# EAGLE board motor (EAGLE 4.16)
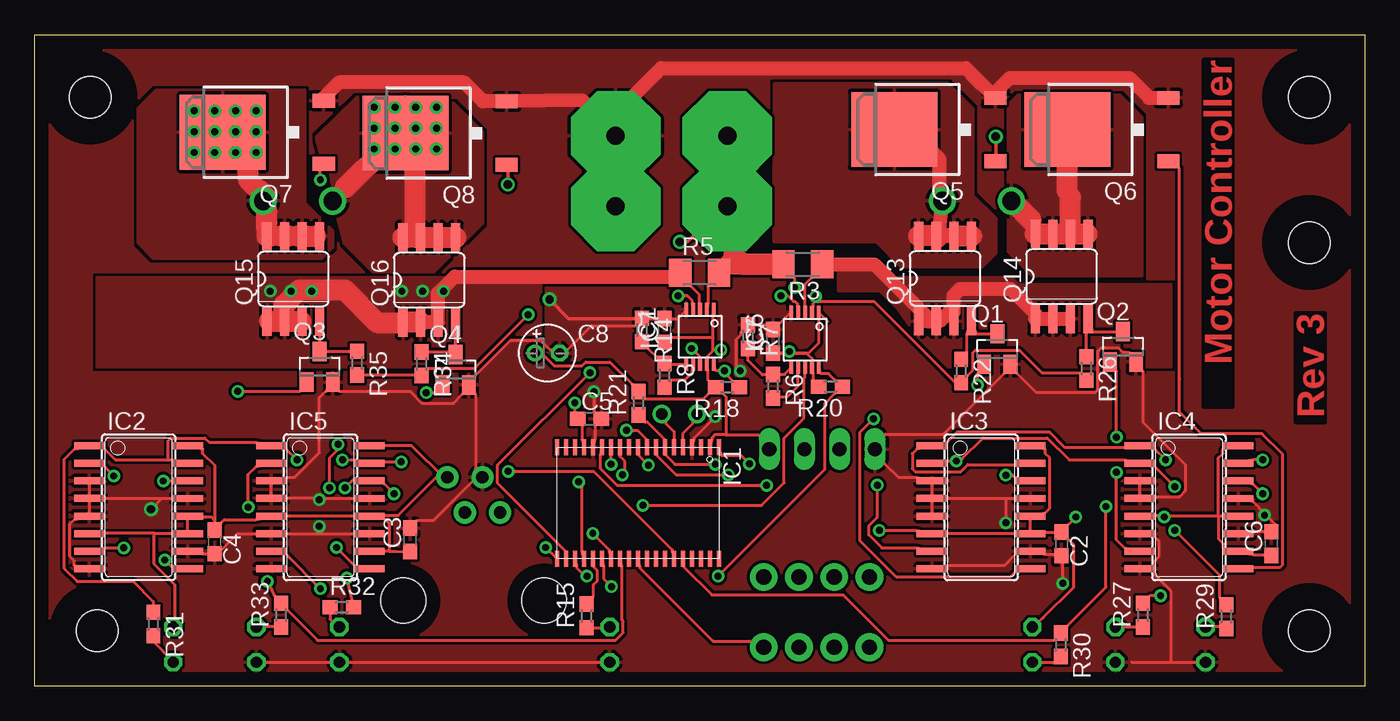
[diagram p0: board, top side]
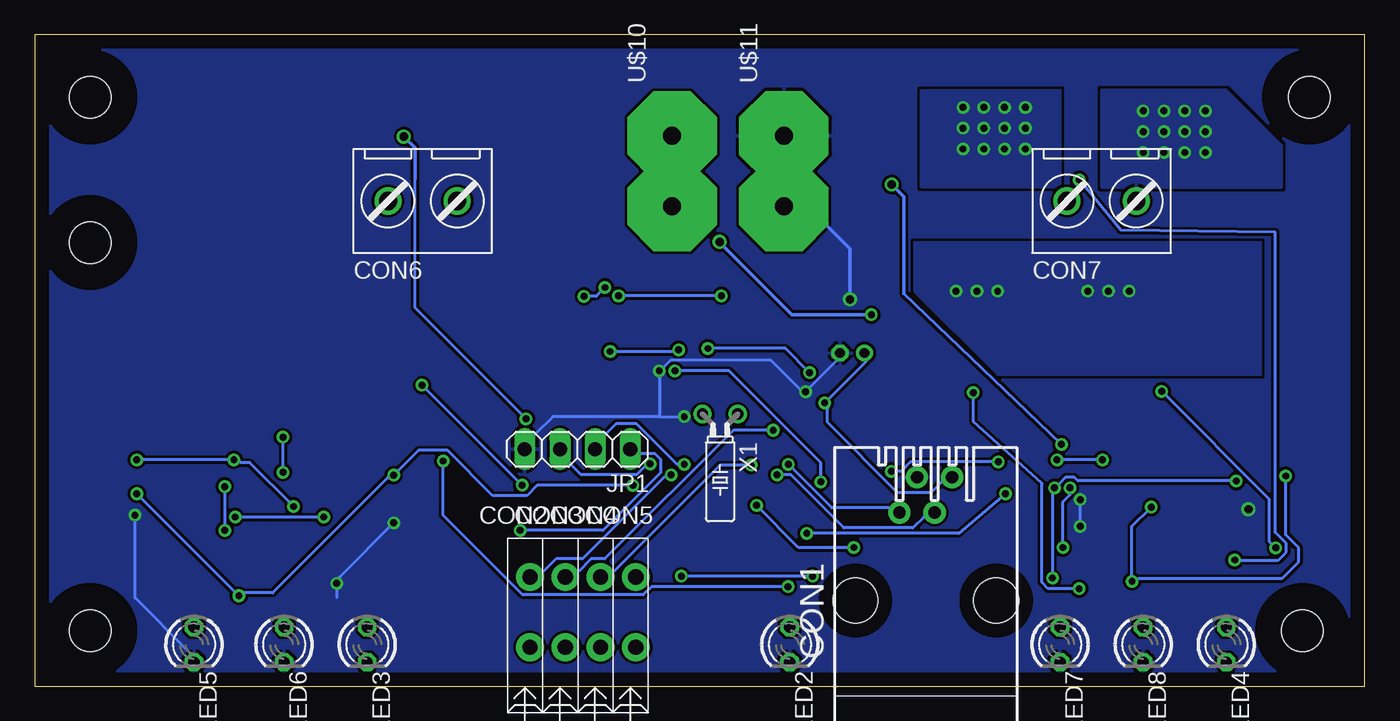
[diagram p1: board, bottom side, seen from below]

Size 96 x 47 mm. Coordinates in mm from the lower left corner, seen from the top.
Outline: 96,0 0,0 0,47 96,47 96,0
Copper layers (1*16): Top 0.035mm / dielectric 1.5mm / Bottom 0.035mm
Design rules "default": minimum track width 0.2mm, minimum drill 0.5mm, track to track 0.2mm, track to pad 0.2mm, pad to pad 0.2mm, via to via 0.2mm, smd to smd 0mil, copper to edge 40mil, drill to drill 8mil, minimum pad ring 10mil, minimum via ring 8mil, stop-mask expansion 4mil, vias tented up to drill 0mil, thermal gap 10mil
Holes 3 mm at 92,42.5 92,4 4,42.5 4.5,4 92,32
tRestrict: area 0.8,39.3 to 7.2,45.7; area 1.3,0.8 to 7.7,7.2; area 88.8,39.3 to 95.2,45.7; area 88.8,28.8 to 95.2,35.2; area 88.8,0.8 to 95.2,7.2
bRestrict: area 0.8,39.3 to 7.2,45.7; area 1.3,0.8 to 7.7,7.2; area 88.8,39.3 to 95.2,45.7; area 88.8,28.8 to 95.2,35.2; area 88.8,0.8 to 95.2,7.2

## Footprints (pad centres in the part's own frame; a part is rotated, then mirrored left to right if it is on the bottom)
C0603 = smd 1.1 x 1: 1 -0.85,0; 2 0.85,0
E1,8-4 = drill 0.711 pad 1.168 round: + -0.889,0 | drill 0.711 pad 1.168 octagon: - 0.889,0
RJ11 = drill 0.889 pad 1.6 round: 1 1.905,7.62; 2 0.635,5.08; 3 -0.635,7.62; 4 -1.905,5.08 | hole 3.251: -5.08,-1.27; 5.08,-1.27
CAGECLAMP = drill 1.1 pad 2 round: 1 0,-0.01; 2 0,-5.08
LUMBERG_CAGE_2 = drill 1.3 round: 1 -2.5,0; 2 2.5,0
TSSOP38 = smd 1.15 x 0.3: 1 0,0; 2 0,-0.65; 3 0,-1.3; 4 0,-1.95; 5 0,-2.6; 6 0,-3.25; 7 0,-3.9; 8 0,-4.55; 9 0,-5.2; 10 0,-5.85; 11 0,-6.5; 12 0,-7.15; 13 0,-7.8; 14 0,-8.45; 15 0,-9.1; 16 0,-9.75; 17 0,-10.4; 18 0,-11.05; 19 0,-11.7; 20 8.05,-11.7; 21 8.05,-11.05; 22 8.05,-10.4; 23 8.05,-9.75; 24 8.05,-9.1; 25 8.05,-8.45; 26 8.05,-7.8; 27 8.05,-7.15; 28 8.05,-6.5; 29 8.05,-5.85; 30 8.05,-5.2; 31 8.05,-4.55; 32 8.05,-3.9; 33 8.05,-3.25; 34 8.05,-2.6; 35 8.05,-1.95; 36 8.05,-1.3; 37 8.05,-0.65; 38 8.05,0
SOP16 = smd 0.5 x 2.2: 1 -4.445,-3.55; 2 -3.185,-3.55; 3 -1.915,-3.55; 4 -0.645,-3.55; 5 0.635,-3.55; 6 1.895,-3.55; 7 3.165,-3.55; 8 4.435,-3.55; 9 4.445,3.55; 10 3.175,3.55; 11 1.905,3.55; 12 0.635,3.55; 13 -0.635,3.55; 14 -1.905,3.55; 15 -3.175,3.55; 16 -4.445,3.55
UMAX = smd 0.94 x 0.254: 1 -1.358,0.193; 2 -1.358,-0.307; 3 -1.358,-0.808; 4 -1.358,-1.308; 5 -1.358,-1.808; 6 2.616,-1.808; 7 2.616,-1.308; 8 2.616,-0.808; 9 2.616,-0.307; 10 2.616,0.193
1X04 = drill 1.016 long: 1 -3.81,0; 2 -1.27,0; 3 1.27,0; 4 3.81,0
LED3MM = drill 0.813 octagon: A -1.27,0; K 1.27,0
SOT23 = smd 1 x 1.4: 1 -0.95,-1.1; 2 0.95,-1.1; 3 0,1.1
TO252-3 = smd 1 x 1.6: 1 -2.16,-5.72; 3 2.4,-5.72 | smd 5.4 x 6.2: 2 0.12,1.58
SO08 = smd 0.66 x 2.032: 1 -1.905,-3.073; 2 -0.635,-3.073; 3 0.635,-3.073; 4 1.905,-3.073; 5 1.905,3.073; 6 0.635,3.073; 7 -0.635,3.073; 8 -1.905,3.073
M1206 = smd 1.6 x 2: 1 -1.4,0; 2 1.4,0
R0603 = smd 1.1 x 1: 1 -0.85,0; 2 0.85,0
SPADE = drill 1.3 pad 6.452 octagon: P$1 -5.08,-3.175; P$2 0,-3.175
TC26H = drill 0.813 round: 1 -1.27,0; 2 1.27,0

## Placement (x,y rotation side)
C1  100nf  [C0603]  45.45,25.66 90 top
C2  100nf  [C0603]  74.11,10.27 270 top
C3  100nf  [C0603]  27.09,10.55 90 top
C4  100nf  [C0603]  12.98,10.41 270 top
C5  100nf  [C0603]  40.05,19.28 0 top
C6  100nf  [C0603]  89.25,10.28 90 top
C7  100nf  [C0603]  53.29,24.88 90 top
C8  100uF  [E1,8-4]  37,24.03 0 top
CON1  MODULE_CON  [RJ11]  31.69,7.45 0 bottom
CON2  FB0  [CAGECLAMP]  60.24,2.8 180 bottom
CON3  FB1  [CAGECLAMP]  57.7,2.8 180 bottom
CON4  FB3  [CAGECLAMP]  55.16,2.8 180 bottom
CON5  FB2  [CAGECLAMP]  52.62,2.8 180 bottom
CON6  HEADER_2  [LUMBERG_CAGE_2]  68,35 0 bottom
CON7  HEADER_2  [LUMBERG_CAGE_2]  19,35 0 bottom
IC1  MSP430F2234  [TSSOP38]  49.4,17.23 270 top
IC2  74153NS  [SOP16]  7.5,12.9 270 top
IC3  74153NS  [SOP16]  68.3,12.9 270 top
IC4  74153NS  [SOP16]  83.3,12.9 270 top
IC5  74153NS  [SOP16]  20.62,12.9 270 top
IC6  MAX4069  [UMAX]  56.41,25.62 270 top
IC7  MAX4069  [UMAX]  48.83,25.84 270 top
JP1  SBW  [1X04]  56.83,17.09 180 bottom
LED2  [LED3MM]  41.5,3 270 bottom
LED3  PWM0  [LED3MM]  72,3 270 bottom
LED4  PWM1  [LED3MM]  10,3 270 bottom
LED5  B0  [LED3MM]  84.5,3 270 bottom
LED6  A0  [LED3MM]  78,3 270 bottom
LED7  A1  [LED3MM]  22,3 270 bottom
LED8  B1  [LED3MM]  16,3 270 bottom
Q1  2N7002  [SOT23]  69.47,24.32 0 top
Q2  2N7002  [SOT23]  78.54,24.48 0 top
Q3  2N7002  [SOT23]  20.57,23.04 0 top
Q4  2N7002  [SOT23]  30.38,22.84 0 top
Q5  FDD8882  [TO252-3]  63.62,40.03 90 top
Q6  FDD8882  [TO252-3]  76.1,40.03 90 top
Q7  FDD8882  [TO252-3]  15.15,39.84 90 top
Q8  FDD8882  [TO252-3]  28.34,39.78 90 top
Q13  NDS8435A  [SO08]  65.7,29.41 0 top
Q14  NDS8435A  [SO08]  74.12,29.56 0 top
Q15  NDS8435A  [SO08]  18.67,29.38 0 top
Q16  NDS8435A  [SO08]  28.48,29.3 0 top
R3  15mR  [M1206]  55.44,30.43 180 top
R5  15mR  [M1206]  47.99,29.83 0 top
R6  100K  [R0603]  53.3,21.64 270 top
R7  100K  [R0603]  51.47,25.21 270 top
R8  100K  [R0603]  45.47,22.42 270 top
R14  100K  [R0603]  43.84,25.7 270 top
R15  330  [R0603]  39.84,5.07 90 top
R18  100K  [R0603]  50,21.57 180 top
R20  100K  [R0603]  57.44,21.6 180 top
R21  47K  [R0603]  43.59,20.41 90 top
R22  100  [R0603]  66.87,22.73 270 top
R26  100  [R0603]  75.9,22.91 270 top
R27  330  [R0603]  79.98,5.12 90 top
R29  330  [R0603]  86,5.02 90 top
R30  330  [R0603]  74.06,2.98 270 top
R31  330  [R0603]  8.57,4.48 270 top
R32  330  [R0603]  22.17,5.69 0 top
R33  330  [R0603]  17.79,5.12 90 top
R34  100  [R0603]  27.93,23.25 270 top
R35  100  [R0603]  23.28,23.3 270 top
U$10  6.3X0.8-SPADE  [SPADE]  53.17,39.7 90 bottom
U$11  6.3X0.8-SPADE  [SPADE]  45.1,39.69 90 bottom
X1  32Khz  [TC26H]  46.53,19.62 180 bottom

## Library data of the parts
C1-C7 = quantum-sensor
C8 R3 R5-R8 R14 R15 R18 R20-R22 R26 R27 R29-R35 = rcl
CON1-CON7 IC1-IC5 Q1-Q8 Q13-Q16 = ecssr
IC6 IC7 U$10 U$11 = ecssr-Pwr
JP1 = pinhead
LED2-LED8 = led
X1 = crystal

## Nets
+12V: IC6.2 IC7.2 R3.2 R5.2 R22.2 R26.2 R34.2 R35.2 U$10.P$2
FEEDBACK_0: CON2.2 IC1.8
FEEDBACK_1: CON3.2 IC1.9
FEEDBACK_2: CON4.2 IC1.10
FEEDBACK_3: CON5.1 IC1.29
GND: C1.2 C2.2 C3.2 C4.2 C5.2 C6.2 C7.2 C8.- CON1.3 IC1.4 IC1.15 IC2.3 IC2.4 IC2.5 IC2.8 IC2.10 IC2.13 IC3.3 IC3.4 IC3.5 IC3.8 IC3.10 IC3.13 IC4.3 IC4.4 IC4.6 IC4.8 IC4.11 IC4.13 IC5.3 IC5.4 IC5.6 IC5.8 IC5.11 IC5.13 IC6.5 IC7.5 JP1.4 LED2.K LED5.K LED6.K LED7.K LED8.K Q1.2 Q2.2 Q3.2 Q4.2 Q5.3 Q6.3 Q7.3 Q8.3 R7.1 R14.1 U$11.P$2
M0_A: IC1.14 IC3.14 IC4.14 R27.2
M0_B: IC1.25 IC3.2 IC4.2 R29.2
M0_COUT: IC1.20 IC6.8
M0_GSEL: IC1.22 IC6.10 R20.1
M0_PWM: IC1.34 IC3.1 IC3.15 IC4.1 IC4.15 R30.1
M0_V+: IC6.3 Q13.1 Q13.2 Q13.3 Q14.1 Q14.2 Q14.3 R3.1
M1_A: IC1.26 IC2.14 IC5.14 R32.2
M1_B: IC1.27 IC2.2 IC5.2 R33.2
M1_COUT: IC1.21 IC7.8
M1_GSEL: IC1.23 IC7.10 R18.1
M1_PWM: IC1.33 IC2.1 IC2.15 IC5.1 IC5.15 R31.1
M1_V+: IC7.3 Q15.1 Q15.2 Q15.3 Q16.1 Q16.2 Q16.3 R5.1
N$1: IC1.7 JP1.2 R21.1
N$2: IC1.24 R15.2
N$3: CON6.2 Q5.2 Q13.5 Q13.6 Q13.7 Q13.8
N$4: IC1.6 X1.1
N$5: Q1.3 Q13.4 R22.1
N$6: LED2.A R15.1
N$7: LED4.K R31.2
N$8: IC3.7 Q1.1
N$10: IC1.1 JP1.3
N$11: CON7.1 Q8.2 Q16.5 Q16.6 Q16.7 Q16.8
N$12: CON7.2 Q7.2 Q15.5 Q15.6 Q15.7 Q15.8
N$13: IC3.9 Q5.1
N$14: CON6.1 Q6.2 Q14.5 Q14.6 Q14.7 Q14.8
N$15: Q2.3 Q14.4 R26.1
N$16: LED5.A R29.1
N$17: IC4.7 Q2.1
N$18: IC4.9 Q6.1
N$19: IC1.5 X1.2
N$20: LED6.A R27.1
N$21: LED7.A R32.1
N$22: LED8.A R33.1
N$25: IC6.7 R6.2
N$26: Q3.3 Q15.4 R35.1
N$27: LED3.K R30.2
N$28: IC6.6 R6.1 R7.2
N$29: IC2.7 Q3.1
N$30: IC2.9 Q7.1
N$32: IC7.7 R8.2
N$33: IC7.6 R8.1 R14.2
N$37: Q4.3 Q16.4 R34.1
N$39: IC5.7 Q4.1
N$40: IC5.9 Q8.1
N$46: IC1.30
N.C.: IC6.4 IC7.4
SCL: CON1.4 IC1.13
SDA: CON1.2 IC1.12
VDD: C1.1 C2.1 C3.1 C4.1 C5.1 C6.1 C7.1 C8.+ CON1.1 IC1.2 IC1.16 IC2.6 IC2.11 IC2.12 IC2.16 IC3.6 IC3.11 IC3.12 IC3.16 IC4.5 IC4.10 IC4.12 IC4.16 IC5.5 IC5.10 IC5.12 IC5.16 IC6.1 IC6.9 IC7.1 IC7.9 JP1.1 LED3.A LED4.A R18.2 R20.2 R21.2

## Tracks (layer width: path | path; a pad name or v marks a point on that pad's centre or on a via)
+12V  (via drill 0.5, 0.6 pad 0.9)
  Top 0.2: 50.42,40.05 50.12,40.05 49.52,39.45 49.52,39.53 49.88,39.88 49.99,39.76 U$10.P$2 | 56.34,27.76 56.16,27.58 56.16,27.44 IC6.2 | 56.34,27.76 60.58,27.76 66.38,21.96 R22.2 67.34,22.42 67.7,22.78 67.7,24.04 67.9,24.24 71.06,24.24 72.7,22.6 75.42,22.6 R26.2 | IC7.2 48.58,27.66 48.58,28.82 48.6,28.84 R5.2 50.18,30.44 | 53.24,30.44 R3.2 54.82,29.44 54.84,29.42 v54.84,28.76 | R35.2 23.76,22.46 27.44,22.46 R34.2 28.42,22.92 31.74,22.92 v35.62,26.8 | v56.36,28.12 56.36,27.84 56.34,27.76
  Top 0.25: 50.47,35.05 50.11,35.05 47.11,32.05 v46.56,32.05
  Top 0.3: 50.42,40.05 51.49,38.99
  Top 1: 49.92,39.62 U$10.P$2 49.92,39.77 49.92,39.85
  Top 1.5: 53.24,30.44 50.18,30.44 | R3.2 51.1,30.43 50.47,31.06 50.47,35.05 50.47,39.23 U$10.P$2 | U$10.P$2 49.78,39.92 | U$10.P$2
  Bottom 0.2: v56.36,28.12 55.48,28.12 v54.84,28.76
  Bottom 0.25: v46.56,32.05 v46.57,32.05 46.59,32.03 41.36,26.8 v35.62,26.8
FEEDBACK_0  (via drill 0.5)
  Top 0.2: v50.06,15.24 46.3,15.24 44.82,16.72 44.82,17.2 IC1.8
  Bottom 0.2: v50.06,15.24 50.4,15.24 56.46,9.18 58.38,9.18 59.26,8.3 CON2.2
FEEDBACK_1  (via drill 0.5)
  Top 0.2: v42.7,18.46 43.5,18.46 44.2,17.76 IC1.9
  Bottom 0.2: v42.7,18.46 45.58,18.46 54.86,9.18 55.84,9.18 56.72,8.3 CON3.2
FEEDBACK_2  (via drill 0.5)
  Top 0.2: IC1.10 43.54,16.7 v44.3,15.94
  Bottom 0.2: v44.3,15.94 46.54,15.94 54.18,8.3 CON4.2
FEEDBACK_3
  Top 0.2: IC1.29 43.68,8.62 43.68,8.52 48.96,3.24 51.64,3.24 CON5.1
GND  (via drill 0.5, 0.6, 0.6 pad 0.9)
  Top 0.2: IC6.5 54.6,26.97 53.36,25.73 C7.2 53.29,25.61 53.24,25.56 52.74,26.06 R7.1 50.98,25.52 50.98,25.36 50.66,25.04 50.66,23 v50.92,22.74 | IC7.5 47.02,27.1 46.43,26.52 C1.2 45.59,26.52 | 45.59,26.52 45.61,26.5 | 45.59,26.52 45.26,26.84 45.26,26.77 45.48,26.55 R14.1 | R14.1 43.78,26.59 | IC3.8 65.84,8.7 69.98,8.7 70.76,9.48 IC3.10 72.94,9.48 73.62,9.48 C2.2 74.2,8.88 v74.2,7.42 | IC4.11 87.94,11.14 88.76,11.14 C6.2 89.58,11.66 88.83,12.41 | 88.83,12.41 87.94,13.3 IC4.13 | IC4.6 80.84,10.76 81.16,10.44 81.16,9.36 80.84,9.04 80.84,8.7 IC4.8 80.84,8.22 80.84,8.02 82.02,6.84 82.02,1.74 | 82.02,1.74 83.84,1.74 | 79.16,1.74 82.02,1.74 | v88.76,12.34 88.83,12.41 | IC4.3 79.76,14.58 79.76,13.78 IC4.4 80.84,13.64 82.6,13.64 83.04,14.08 83.04,15.98 79.98,19.04 79.98,22.7 Q2.2 79,24.08 78.54,24.08 78.22,24.4 76.96,24.4 76.72,24.16 76.72,21.38 76.54,21.2 72.26,21.2 70.92,22.54 Q1.2 69.94,22.54 65.58,18.18 61.38,18.18 JP1.4 61.38,16.02 62.34,15.06 63.66,15.06 IC3.3 64.76,14.58 64.76,13.78 IC3.4 | IC3.5 64.76,12.5 64.76,13.3 IC3.4 | 70.08,13.54 65.84,13.54 IC3.4 | 70.08,13.54 70.76,13.54 IC3.13 | v49.12,19.44 47.58,17.9 47.58,17.8 IC1.4 | 70.08,13.54 v70.08,11.78 | IC2.10 12.14,9.56 C4.2 12.98,9.44 13.04,9.38 14.66,11.01 IC5.6 18.16,11 20.54,11 | 20.54,11 23.08,11 IC5.11 | IC2.8 2.86,8.7 2.86,9.04 2.54,9.36 2.54,11.7 2.86,12.02 IC2.5 3.96,12.5 3.96,13.3 IC2.4 | IC2.4 3.96,13.78 3.96,14.58 IC2.3 | IC2.4 5.04,13.54 9.96,13.54 IC2.13 9.18,13.54 v8.4,12.76 | 16.66,1.74 21.34,1.74 | 22.66,1.74 40.84,1.74 | Q3.2 21.04,21.26 | 20.54,13.54 18.16,13.54 IC5.4 17.08,13.78 17.08,14.58 IC5.3 18.16,15.06 18.76,15.06 20.54,16.84 20.54,20.79 21.52,21.77 Q3.2
  Top 0.2: 20.54,13.54 23.08,13.54 IC5.13 | IC1.15 40.44,17.8 40.44,18.8 C5.2 40.36,19.76 v40.36,21.24 | R14.1 43.36,26 40.18,26 38.48,24.3 C8.- 37.28,24.28 37.18,24.28 36.52,24.94 34.34,24.94 31.82,22.42 Q4.2 | C3.2 27.58,11.94 28.76,11.94 31.54,14.72 CON1.3 31.82,15.68 31.82,21.04 Q4.2 | Q3.2 22,21.26 27.1,21.26 27.94,20.42 30.22,20.42 30.84,21.04 Q4.2 | 20.54,11 v20.54,11.52 | v20.54,13.46 20.54,13.54
  Top 0.25: C1.2 38.55,26.52 v37.16,27.9
  Top 1: Q6.3 80.44,42.44 79,43.88 70.4,43.88 69.3,42.78 69.34,42.74 Q5.3 | 20.8,42.38 20.87,42.31 Q7.3 20.87,42.36 20.82,42.41 21.98,43.55 30.98,43.55 32.35,42.18 Q8.3 39.5,42.26 42.05,39.7 42.03,39.69 U$11.P$2 | U$11.P$2 40.79,40.83 | 41.98,39.6 41.93,39.65 U$11.P$2 | Q5.3 67.62,44.16 | U$11.P$2 41.87,39.63 41.83,39.63 41.83,41.18 44.85,44.2 | 44.85,44.2 44.9,44.26 | Q5.3 67.19,44.58 45.23,44.58 44.85,44.2
  Bottom 0.2: 83.84,1.74 LED5.K | v88.76,12.34 88.76,6.36 84.78,2.38 | 74.2,6.4 v74.2,7.42 74,7.86 v70.08,11.78 | 50.92,19.44 58.6,19.44 59.88,18.16 JP1.4 | 50.92,19.44 v49.12,19.44 | 50.92,19.44 v50.92,22.74 50.58,23.04 50.12,23.5 42.86,23.5 40.8,21.44 v40.36,21.24 38.16,23.44 C8.- | LED2.K 40.84,1.74 | v20.54,11.52 v20.54,13.46 | v8.4,12.76 8.5,12.76 8.52,12.78
  Bottom 0.25: v37.16,27.9 37.16,31.57 40.73,35.14 41.5,35.14 41.92,34.72 41.92,39.6 41.83,39.69 | 41.83,39.69 41.78,39.74 | 41.83,39.69 U$11.P$2
  pour Top (rank 3): -4.5,50 -4.5,-3 99,-3 99,50
  pour Bottom (rank 3): -8.96,51.06 -7.5,-4.5 101,-4.5 101,51
M0_A  (via drill 0.5)
  Top 0.2: v81.26,6.52 80.48,6.52 R27.2 | v88.62,13.88 87.94,14.56 IC4.14 | v52.82,14.48 42.04,14.48 40.84,15.68 40.84,16.66 IC1.14 | v70.08,15.22 70.58,15.22 70.76,15.04 IC3.14
  Bottom 0.2: v88.62,13.88 v81.26,6.52 80.82,6.72 78.82,6.72 70.52,15.02 v70.08,15.22 68.3,17 66.2,17 62.94,13.74 60.48,13.74 59.74,14.48 v52.82,14.48
M0_B  (via drill 0.5)
  Top 0.2: v82.28,11.24 85.5,8.02 85.5,6.4 R29.2 | v82.28,14.4 80.84,15.84 IC4.2 78.66,16.32 74.66,16.32 73.08,17.9 68.42,17.9 66.96,16.44 v66.52,16.24 65.84,16.24 IC3.2 | v41.62,7.18 41.08,7.72 41.08,8.62 IC1.25
  Bottom 0.2: v82.28,14.4 v82.28,11.24 | v41.62,7.18 51.48,7.18 52.08,6.58 60.78,6.58 66.52,12.32 v66.52,16.24
M0_COUT  (via drill 0.5)
  Top 0.2: IC6.8 55.6,22.96 55.58,22.94 55.58,22.26 55.52,22.18 55.52,19.34 54.08,17.9 54.08,14.66 52.46,13.04 v43.9,13.04 | v36.88,10 37.56,9.32 IC1.20
  Bottom 0.2: v43.9,13.04 40.86,10 v36.88,10
M0_GSEL  (via drill 0.5)
  Top 0.2: IC6.10 56.72,22.54 57.3,22.54 57.76,22.08 R20.1 57.76,21.12 57.02,20.38 57.02,15.64 v49.32,7.94 | v39.86,7.94 39.72,7.94 39.14,8.52 39.14,8.62 IC1.22
  Bottom 0.2: v39.86,7.94 v49.32,7.94
M0_PWM  (via drill 0.5)
  Top 0.2: IC3.15 70.76,15.98 67.34,15.98 66.84,15.48 63.56,15.48 63.34,15.7 63.34,16.78 63.66,17.1 IC3.1 65.84,17.58 66.56,18.3 73.26,18.3 74.36,17.2 78.66,17.2 IC4.1 80.84,17.1 v81.62,16.32 | v88.62,16.32 87.94,16.32 IC4.15 | IC1.34 46.84,8.62 48.88,6.58 58.34,6.58 61.62,3.3 73.56,3.3 R30.1 74.54,4.36 77.32,7.14 v77.32,12.96
  Bottom 0.2: v88.62,16.32 v81.62,16.32 81.18,16.12 80.48,16.12 v77.32,12.96
M0_V+
  Top 0.2: IC6.3 55.6,27.44 55.6,29 56.04,29.44 R3.1
  Top 0.5: Q13.1 63.85,26.34 63.96,26.23 64.07,26.34 | 66.41,26.3 66.37,26.34 Q13.3 66.33,26.98 65.97,26.98 | 72.24,26.84 72.22,26.82 Q14.1 | Q14.2 73.56,26.49 73.6,26.53 | Q14.3 74.62,26.49 74.58,26.53 74.54,26.49
  Top 1: 64.39,26.34 Q13.2 65.33,26.34 65.97,26.98 | 64.39,26.34 64.07,26.34 | 66.33,26.98 66.33,28.19 66.81,28.66 70.42,28.66 72.24,26.84 | Q14.1 Q14.2 74.54,26.49 | 64.39,26.34 64.39,26.64 60.6,30.43 R3.1
  pour Top: 61,29 82,29 82,23 61,23 63.5,23 63.5,25.5
  pour Top: 61,28.5 58,28.5 58,30.5 60.5,30.5 61.5,29.5 70.5,29.5 71,29 82,29 82,23 66.5,23
M1_A  (via drill 0.5)
  Top 0.2: v22.4,14.3 23.08,14.98 IC5.14 24.15,14.78 | v40.28,11.02 41.46,9.84 41.46,9.74 IC1.26 | v9.28,14.8 9.96,14.8 IC2.14 | v22.54,7.8 22.56,7.8 22.52,7.77 R32.2 | 24.15,14.78 23.94,14.78 | v25.94,13.88 25.04,14.78 24.15,14.78
  Bottom 0.2: v22.54,7.8 22.54,14.16 v22.4,14.3 22.06,14.6 21.6,15.06 20.96,15.06 20.7,14.8 v9.28,14.8 | v40.28,11.02 29.3,11.02 v25.94,13.88
M1_B  (via drill 0.5)
  Top 0.2: v16.8,7.56 17.3,6.52 R33.2 18.28,5.44 20.42,3.3 41.92,3.3 42.48,3.86 42.48,4.68 42.38,4.78 42.38,8.62 IC1.27 | v15.42,12.92 15.42,15.28 15.98,15.84 IC5.2 | v5.72,15.16 5.04,15.84 IC2.2
  Bottom 0.2: v15.42,12.92 16.8,11.54 v16.8,7.56 16.36,7.76 6,7.76 4.78,8.98 4.78,9.98 5.72,10.92 v5.72,15.16
M1_COUT  (via drill 0.5)
  Top 0.2: v47.42,24.36 47.96,23.82 47.96,23.68 IC7.8 | v40.08,22.62 33.42,15.96 33.42,14.62 38.3,9.74 IC1.21
  Bottom 0.2: v47.42,24.36 41.82,24.36 v40.08,22.62
M1_GSEL  (via drill 0.5)
  Top 0.2: 49.04,23.14 49.02,23.16 IC7.10 49.14,22.76 49.62,22.76 49.71,22.67 | 49.71,22.67 50.32,22.06 R18.1 | v39.26,14.74 39.5,14.5 39.5,9.74 IC1.23 | v49.8,22.74 49.78,22.74 49.71,22.67
  Bottom 0.2: v39.26,14.74 39.26,16.1 45.9,22.74 v49.8,22.74
M1_PWM  (via drill 0.5)
  Top 0.2: v34.18,15.5 40.34,15.5 46,9.84 46,9.74 IC1.33 | v26.46,16.18 25.26,16.18 IC5.15 23.08,16.32 v22.22,16.32 | 9.64,16.32 5.82,16.32 5.04,17.1 IC2.1 2.86,17.1 2.14,16.38 2.14,8.48 3.06,7.56 7.1,7.56 8.56,6.1 R31.1 | 9.64,16.32 9.96,16.32 IC2.15 | 9.64,16.32 9.64,17.72 9.82,17.9 12.28,17.9 12.6,17.58 15.98,17.58 IC5.1 18.16,17.1 v18.94,16.32 | R31.1 8.56,5.3 | R31.1
  Bottom 0.2: v34.18,15.5 33.46,15.5 32.78,16.18 v26.46,16.18 | v18.94,16.32 v22.22,16.32
M1_V+  (via drill 0.5 pad 0.9)
  Top 0.2: IC7.3 47.96,27.66 47.96,28.26 47.38,28.84 R5.1
  Top 0.5: 27.77,26.3 Q16.2 27.92,26.3 | Q16.1 26.65,26.3 | 29.08,26.3 29.08,26.27 Q16.3 | Q15.2 18.03,26.31 18.02,26.3 18,26.33 | 19.2,26.31 19.2,26.3 19.2,26.31 | Q15.1 16.8,26.31 16.88,26.38 16.93,26.33
  Top 0.813: 19.2,26.31 Q15.3
  Top 1: 27.92,26.3 29.08,26.3 | Q16.3 29.12,28.34 30.31,29.54 46.27,29.54 46.59,29.86 | 46.59,29.86 46.68,29.95 | 46.59,29.86 R5.1
  Top 1.5: 26.65,26.3 27.77,26.3 | Q16.1 24.73,26.23 22.38,28.58 19.1,28.58 18,27.48 18,26.33 16.93,26.33 | 18.03,26.31 19.2,26.31
  other vias: 17,28.5 18.5,28.5 20,28.5 26.5,28.5 28,28.5 29.5,28.5
  pour Top: 4.5,29.5 36.5,29.5 36.5,23 4.5,23
  pour Bottom: 7.5,32 32.5,32 32.5,28.5 26.5,22.5 7.5,22.5
N$1  (via drill 0.5)
  Top 0.2: R21.1 44.08,19.02 44.24,19.02 45.46,17.8 IC1.7 45.48,17.21 45.48,16.72 46.2,16 v49.12,16
  Bottom 0.2: v49.12,16 49.64,16 52.56,18.92 54.04,18.92 54.8,18.16 JP1.2
N$2
  Top 0.2: R15.2 40.32,6.46 40.32,7.32 40.62,7.62 40.62,8.34 40.34,8.62 IC1.24
N$3
  Top 0.5: 66.53,32.48 66.41,32.6 66.33,32.52 Q13.6 65.24,32.48 | 65.13,32.37 65.06,32.44 Q13.7 | 63.99,32.48 64.03,32.52 64.07,32.48
  Top 1: Q5.2 62.04,39.59 62,39.55 | 62,39.55 60.55,38.1 | 62,39.55 61.95,39.6 | 62,39.55 62.6,38.95 64.38,38.95 65.29,38.04 65.29,35.19 CON6.2 65.27,32.61 65.35,32.53 65.3,32.48 Q13.7 | Q13.6 65.89,32.54 | 65.24,32.48 66.95,32.48 66.95,32.37
  Top 1.5: 66.53,32.48 Q13.5 | 65.13,32.37 65.24,32.48 | 63.99,32.48 Q13.8 | Q13.7 64.07,32.48
  pour Top (rank 2): 53.41,43.46 53.37,32.06 53.36,32.06 60.74,32.06 62.53,30.27 68.39,30.27 69.36,31.24 69.36,33.75 67.72,35.39 67.72,41.66 65.91,43.47 58.15,43.47
N$4
  Top 0.2: X1.1 45.54,18.98 46.16,18.36 46.16,17.21 | 46.16,17.21 46.16,17.1 | 46.16,17.21 IC1.6
N$5
  Top 0.2: R22.1 67.28,24.12 67.28,25.34 Q13.4 67.92,25.42 68.98,25.42 Q1.3
N$6
  Top 0.2: 41.73,4.27 41.74,4.28 | 41.73,4.27 LED2.A | R15.1 41.68,4.22 41.73,4.27
N$7
  Top 0.2: 10.03,1.73 10.08,1.68 | LED4.K 10.03,1.73 | R31.2 8.57,3.18 10.03,1.73
N$8  (via drill 0.5)
  Top 0.2: v68.04,21.72 68.04,22.54 Q1.1 | v60.82,14.5 60.82,12.18 60.2,11.56 60.2,10.92 61.14,9.98 63.66,9.98 IC3.7
  Bottom 0.2: v60.82,14.5 v68.04,21.72
N$10  (via drill 0.5)
  Top 0.2: 49.44,17.23 IC1.1 49.54,16.66 50.96,16.66 v51.58,16.04
  Bottom 0.2: v51.58,16.04 51.78,16.04 52.56,15.26 56.58,15.26 57.34,16.02 JP1.3
N$11  (via drill 0.5 pad 0.9)
  Top 0.2: Q16.6 29.44,32.38 | CON7.1 22.4,35.94
  Top 1: 25.77,38.97 26.7,39.9 Q8.2 26.77,39.97 | 26.77,39.97 26.83,40.03 | 26.23,39.93 26.73,39.93 26.77,39.97 | Q16.7 27.52,32.38
  Top 1.5: 26.73,39.93 27.42,39.93 27.42,32.73 27.79,32.37 Q16.7 28.16,32.38 28.8,32.38 Q16.6 | 27.52,32.38 26.9,32.38 Q16.8 | 29.44,32.38 30.06,32.38 Q16.5 | 22.4,35.94 23.68,37.22 Q8.2
  other vias: 24.5,41.75 26,41.75 27.5,41.75 29,41.75 24.5,40.25 26,40.25 27.5,40.25 29,40.25 24.5,38.75 26,38.75 27.5,38.75 29,38.75
  pour Top (rank 2): 29.78,42.52 32.33,39.97 32.33,33.41 28.71,29.79 24.51,29.79 22.38,31.92 20.33,39.59 23.3,42.52
  pour Bottom: 22,43 22,36 32,36 32,43
N$12  (via drill 0.5 pad 0.9)
  Top 0.2: 19.27,32.45 19.28,32.46 Q15.6 19.62,32.46 | 20.26,32.46 Q15.5
  Top 0.5: 19.26,32.47 19.27,32.45 19.28,32.45
  Top 1: 17.08,32.46 17.72,32.46 | 18.36,32.46 18.98,32.46 | CON7.2 16.75,35.22
  Top 1.5: 13.57,39.9 13.48,39.8 | 13.57,39.9 Q7.2 | 13.57,39.9 13.65,39.98 14.18,39.98 14.43,39.73 15.43,39.73 15.43,36.55 16.75,35.22 | 17.08,32.46 Q15.8 16.76,33.46 16.76,34.26 CON7.2 | 17.72,32.46 Q15.7 18.36,32.46 | 18.98,32.46 Q15.6 | 19.62,32.46 20.26,32.46
  other vias: 11.5,41.5 13,41.5 14.5,41.5 16,41.5 11.5,40 13,40 14.5,40 16,40 11.5,38.5 13,38.5 14.5,38.5 16,38.5
  pour Top (rank 2): 19.49,43 19.49,34.87 21.51,32.86 21.51,31.68 20.71,30.88 8.56,30.88 7.47,31.97 7.47,41.69 8.78,43
  pour Bottom: 19,43 19,36 6,36 6,39 10,43
N$13  (via drill 0.5, 0.6 pad 0.9)
  Top 0.2: v60.54,19.28 59.56,18.3 59.56,10.5 62.16,7.9 70.44,7.9 70.76,8.22 IC3.9
  Top 0.25: Q5.1 69.36,37.9 v69.36,39.65
  Bottom 0.2: 68.56,36.62 68.56,27.3 v60.54,19.28
  Bottom 0.25: 68.56,36.62 68.56,38.85 v69.36,39.65
N$14
  Top 0.2: 71.9,33.64 Q14.8 | CON6.1 71,34.54 | 74.51,35.5 74.52,35.74
  Top 0.5: Q14.7 73.61,32.5 | Q14.7 | Q14.7 | Q14.6 74.68,32.63 | Q14.5 75.99,32.59 75.95,32.63 | 74.75,35.26 74.51,35.5
  Top 1.5: Q6.2 74.5,40.16 74.45,40.2 | Q6.2 74.52,39.36 | Q14.8 Q14.7 | Q14.7 74.68,32.63 | 75.95,32.63 Q14.6 74.75,35.26 | 71,34.54 71.9,33.64 | 74.52,35.74 Q6.2
  pour Top (rank 2): 70.95,42.64 78.3,42.64 79.89,41.05 79.89,29.61 72,29.61 70.26,31.35 70.26,41.95
N$15
  Top 0.2: R26.1 75.9,25.48 Q14.4 76.34,25.58 78.06,25.58 Q2.3
N$16
  Top 0.2: R29.1 85.95,4.16 85.85,4.27 LED5.A
N$17  (via drill 0.5)
  Top 0.2: v78.08,17.96 78.08,22.7 Q2.1 | v78.08,15.42 78.08,10.56 78.66,9.98 IC4.7
  Bottom 0.2: v78.08,15.42 v78.08,17.96
N$18
  Top 0.2: 82.6,22.22 82.6,22.12 | 82.6,22.22 82.6,37.38 Q6.1 | IC4.9 87.94,8.58 89.9,8.58 90.06,8.74 90.06,16.74 88.58,18.22 84.18,18.22 82.6,19.8 82.6,22.22
N$19
  Top 0.2: X1.2 47.52,18.98 46.8,18.26 IC1.5
N$20
  Top 0.2: 80,4.28 | 80,4.28 R27.1 | LED6.A R27.1 80,4.28
N$21
  Top 0.2: LED7.A 22,4.2 21.98,4.18 21.32,4.84 R32.1
N$22
  Top 0.2: R33.1 17.3,4.28 16.08,4.28 16.06,4.3 16.03,4.27 LED8.A
N$25
  Top 0.2: 55.1,22.82 55.09,22.81 | 55.1,22.82 IC6.7 | 55.1,22.82 55.1,21.64 54.34,20.89 53.04,20.89 | 53.04,20.89 53.14,20.79 R6.2 | 53.04,20.89 53.02,20.91
N$26
  Top 0.2: R35.1 22.8,24.16 21.06,24.16 Q3.3 20.58,24.82 20.58,25.3 Q15.4
N$27
  Top 0.2: R30.2 74.01,2.13 74,2.14 73.59,1.73 LED3.K
N$28
  Top 0.2: 54.58,22.98 IC6.6 54.6,22.97 54.11,22.48 R6.1 53.34,22.48 53.37,22.46 52.52,22.46 51.47,23.5 R7.2
N$29  (via drill 0.5)
  Top 0.2: v14.66,21.26 19.14,21.26 Q3.1 | v6.44,9.98 5.04,9.98 IC2.7
  Bottom 0.2: v14.66,21.26 6.88,13.48 6.88,10.42 v6.44,9.98
N$30  (via drill 0.5)
  Top 0.2: v20.62,36.52 20.62,37.2 Q7.1 | v9.4,9.1 9.96,8.54 IC2.9
  Bottom 0.2: v20.62,36.52 17.62,32.9 6.48,32.76 6.48,11.1 5.68,10.3 5.68,9.66 6.24,9.1 v9.4,9.1
N$32
  Top 0.2: IC7.7 47.46,22.76 47.46,22.62 46.94,22.1 45.96,22.1 R8.2
N$33
  Top 0.2: IC7.6 46.9,23.24 45.96,23.24 R8.1 44.98,23.64 44.32,24.3 R14.2
N$37
  Top 0.2: R34.1 28.42,24.12 29.9,24.12 Q4.3 30.38,25.22 Q16.4
N$39  (via drill 0.5)
  Top 0.2: v28.26,21.18 28.94,21.18 Q4.1 | v20.62,7.04 18.16,9.5 IC5.7
  Bottom 0.2: v28.26,21.18 28.26,19.08 23.3,14.62 23.3,7.48 22.86,7.04 v20.62,7.04
N$40  (via drill 0.5, 0.6 pad 0.9)
  Top 0.2: v21.9,17.44 21.9,17.08 21.28,16.46 v21.28,14.3 | v21.78,10 23.08,8.7 IC5.9
  Top 0.25: 34.04,37.62 33.91,37.75 | 34.04,37.62 Q8.1 | v34.15,36.19 34.15,37.51 34.04,37.62
  Bottom 0.2: v21.9,17.44 33.28,28.32 | v21.28,14.3 21.28,13.8 21.78,13.3 v21.78,10
  Bottom 0.25: 33.28,28.32 33.28,35.32 v34.15,36.19
N.C.  (via drill 0.5)
  Top 0.2: v46.44,28.16 47.1,28.16 47.46,27.8 47.46,27.66 IC7.4 | v53.86,28.16 54.36,28.16 54.76,27.76 54.86,27.76 55.04,27.58 55.04,27.44 IC6.4
  Bottom 0.2: v46.44,28.16 v53.86,28.16
SCL  (via drill 0.5)
  Top 0.2: v41.6,16 41.6,16.66 IC1.13
  Bottom 0.2: v41.6,16 38.46,12.86 34.38,12.86 CON1.4
SDA  (via drill 0.5)
  Top 0.2: 42.38,15.28 v42.42,15.24 42.38,15.24 42.36,15.26 42.6,15.5 42.6,16.22 42.24,16.57 IC1.12
  Bottom 0.2: v42.42,15.24 41.42,15.24 37.6,11.42 32.62,11.42 31.84,12.2 CON1.2
VDD  (via drill 0.5)
  Top 0.2: 57.23,26.32 56.6,26.95 IC6.1 56.6,24.77 55.79,23.96 | 55.72,24.03 55.79,23.96 | IC6.9 | IC7.9 | 56.09,23.14 56.09,23.01 IC6.9 | IC6.9 56.1,23.65 55.79,23.96 | C6.1 88.76,9.48 87.94,9.48 IC4.10 85.76,9.96 85.76,10.3 85.44,10.62 85.44,12.28 | 85.44,12.28 85.76,12.28 IC4.12 | 81.52,12.28 85.44,12.28 | 81.52,12.28 80.84,12.28 IC4.5 | IC4.16 85.76,17.1 85.76,16.78 85.44,16.46 85.44,12.28 | C2.1 73.62,11.12 72.94,11.12 IC3.11 | IC3.11 70.76,11.02 65.84,11.02 IC3.6 63.66,11.24 v60.96,11.24 | IC3.11 71.86,11.24 71.86,12.02 IC3.12 72.94,12.5 73.26,12.82 73.26,16.46 72.94,16.78 72.94,17.1 IC3.16 | C2.1 74.6,10.58 74.96,10.22 74.96,7.1 72.78,4.92 72.76,4.92 72,4.16 | v75.14,12.2 74.6,11.66 C2.1 | v81.52,12.2 81.52,12.28 | IC1.16 39.5,17.8 39.5,18.8 C5.1 38.98,19.76 v38.98,20.44 | 49.88,18.12 52.26,18.12 JP1.1 | 49.88,18.12 49.1,18.12 48.88,17.9 48.88,17.8 IC1.2 | R20.2 56.16,22.08 56.16,22.54 IC6.9 | IC7.9 48.58,22.76 48.58,22.1 48.62,22.06 R18.2 | 48.96,24.26 48.96,24.2 48.58,23.82 48.58,23.68 IC7.9 | 48.96,24.26 48.96,25.12 | 48.96,25.12 48.96,26.74 IC7.1 | R18.2 48.62,21.08 48.26,20.72 44.08,20.72 R21.2 43.1,21.8 41.52,23.38 39.76,23.38 39.5,23.12 37.48,23.12 36.82,23.78 36.72,23.78 C8.+ | C1.1 45.94,25.12 48.96,25.12 | v54.46,24.14 54.46,24.03 | 48.96,24.26 v49.52,24.26 | 49.88,18.12 49.88,20.88 49.68,21.08 R18.2 | 25.58,9.72 25.26,9.72 IC5.10 | 25.58,9.72 26.1,9.72 C3.1 | C4.1 13,11.24 13,11.98 12.76,12.22 11.04,12.22 | 8.64,11.02 9.96,11.02 IC2.11 11.07,10.99 11.1,11.02 11.04,11.08 11.04,12.22 | 8.64,11.02 5.04,11.02 IC2.6 | C4.1 13.46,11.8 13.68,12.02 15.98,12.02 IC5.5 18.16,12.28 23.08,12.28 IC5.12 24.2,12.3 24.2,12.32 25.04,12.32
  Top 0.2: IC2.16 12.14,17.1 12.14,16.78 13.02,15.9 13.02,11.64 12.98,11.6 C4.1 | 8.64,11.02 8.64,8.78 10.14,7.28 10.14,4.41 LED4.A | 25.04,12.32 25.04,12.28 25.58,11.74 25.58,9.72 | IC5.16 27.22,17.34 29.58,14.98 29.66,15.07 CON1.1 29.73,15.07 29.68,15.12 29.58,15.02 28.94,15.02 26.24,12.32 25.04,12.32 | IC2.12 11,12.27 11,12.26 11.04,12.22 | C4.1 13.02,11.3 | 72,4.16 71.98,4.14 | 72,4.16 LED3.A
  Top 0.25: C7.1 54.46,24.03 55.72,24.03
  Bottom 0.2: v75.14,12.2 v81.52,12.2 | C8.+ 35.98,23.44 v38.98,20.44 38.78,20 38.78,19.02 33.72,13.96 31.32,13.96 30.56,14.72 CON1.1 | v54.46,24.14 49.64,24.14 v49.52,24.26 | v60.96,11.24 54.98,11.24 50.82,15.4 50.82,16.36 51.26,16.8 52.26,16.8 JP1.1

## Text on the board
Top: Motor Controller | Rev 3